# Altium PCB board.PcbDoc
Units mm, origin at the board's own origin, x right, y up, seen from the top; angles counter-clockwise.
Board outline 116 x 94 mm, 2 copper layers (Top Layer, Bottom Layer); 37 components, 58 nets, 544 pads, 102 vias.
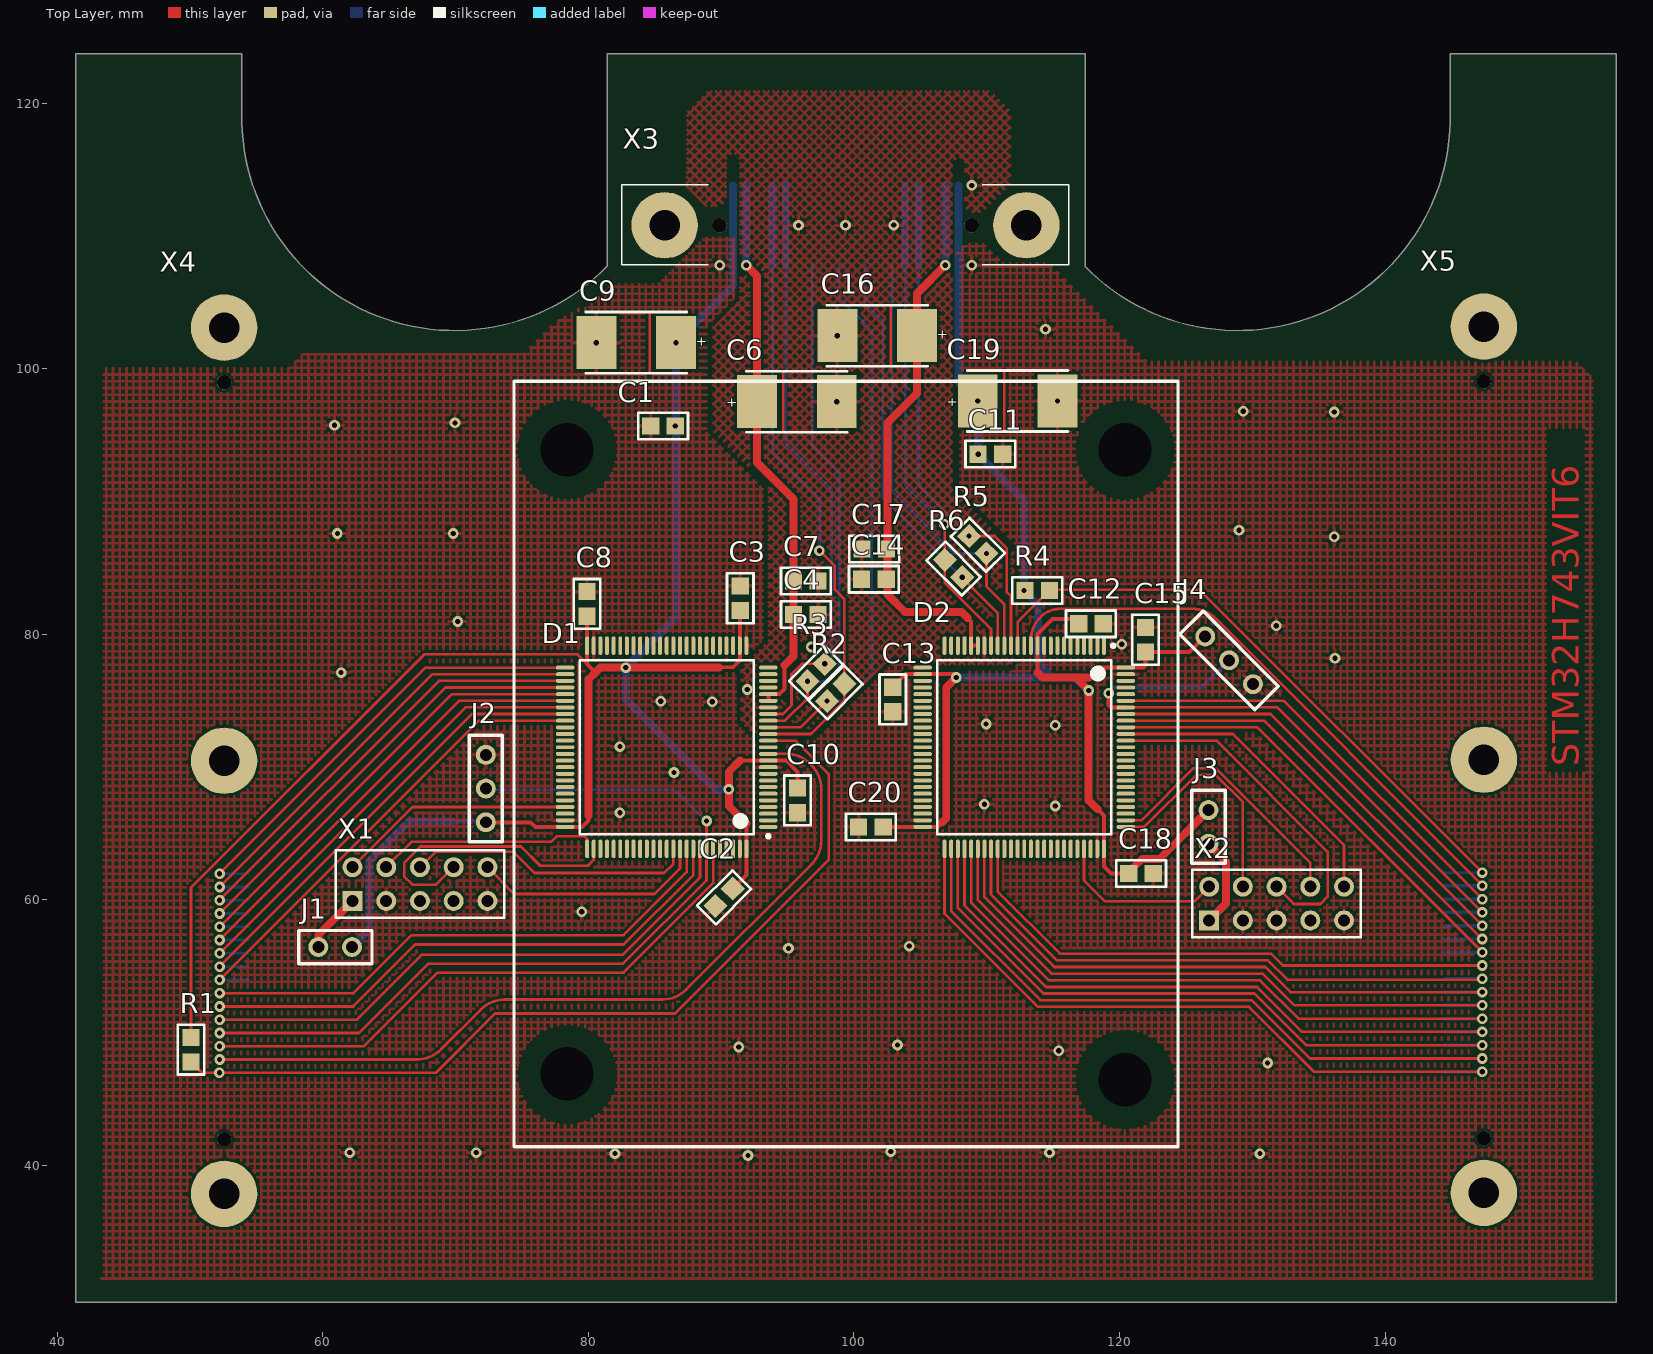
[diagram p0: Top Layer view]
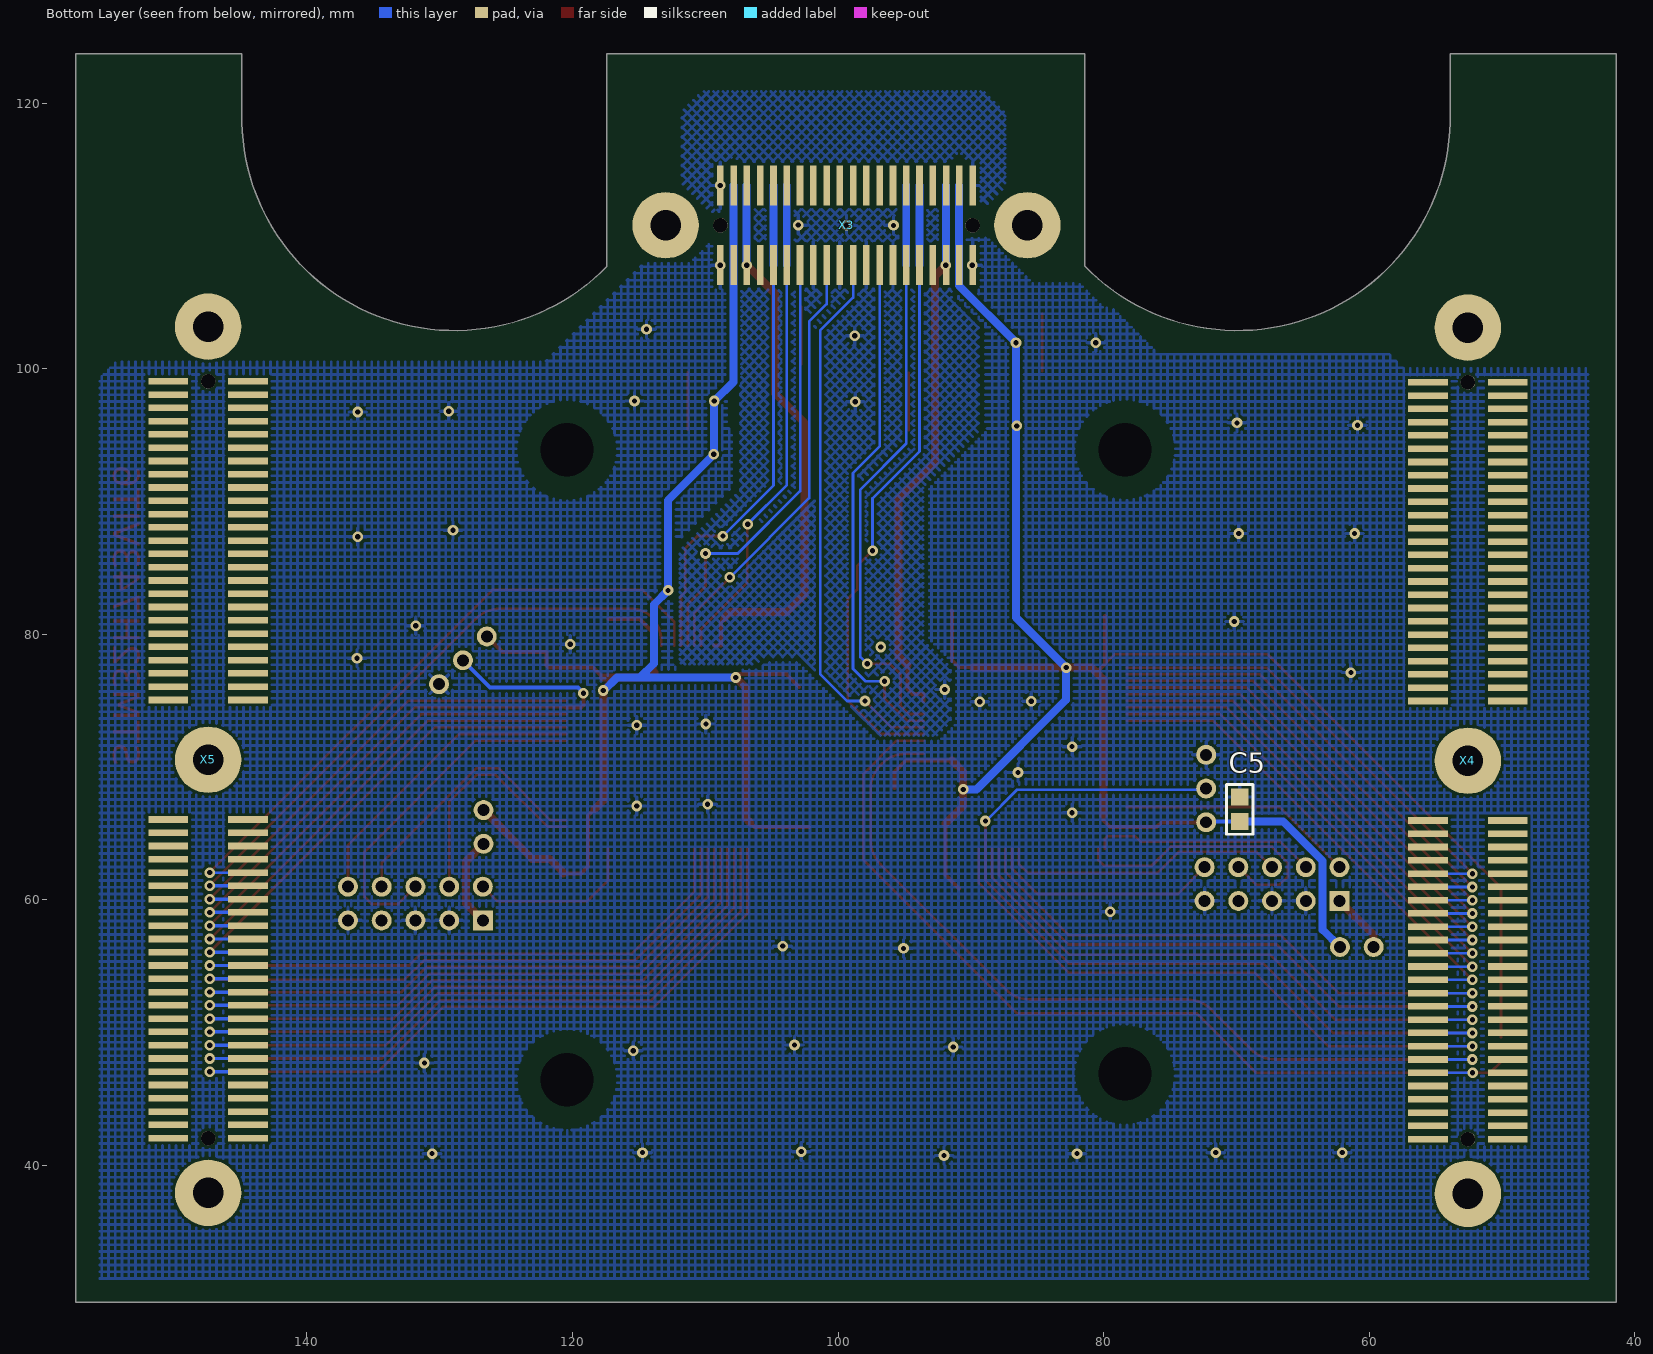
[diagram p1: Bottom Layer view, seen from below]

## Layer stack, top to bottom
Top Solder: solder mask 0.0102, Solder Resist, Dk 3.5
Top Layer: signal copper 0.0356
Dielectric 1: dielectric 0.32, FR-4, Dk 4.8
Bottom Layer: signal copper 0.0356
Bottom Solder: solder mask 0.0102, Solder Resist, Dk 3.5

## Board outline
41.4,29.718 41.4,123.718 53.899,123.718 53.902,123.721 53.902,118.571 ccw(c69.927,118.908) 81.402,107.718 81.402,123.718 117.402,123.718 117.402,107.718 ccw(c128.877,118.908) 144.902,118.571 144.902,123.721 144.905,123.718 157.402,123.718 157.402,29.718

## Design rules (kind name [scope] priority, off if disabled: settings)
BoardOutlineClearance [All] p1: gap=1 ignorepadtopadclearanceinfootprint=FALSE
Clearance [All] p1: gap=0.15 ignorepadtopadclearanceinfootprint=FALSE except(0: Arc-Hole Track-Hole SMDPad-Hole THPad-Hole Via-Hole Fill-Hole Poly-Hole Region-Hole Text-Hole; 0.2: Arc-Poly Track-Poly SMDPad-Poly THPad-Poly Via-Poly Fill-Poly Poly-Poly)
ComponentClearance [All] p1: gap=0.15 collisioncheckmode=3 verticalgap=0.254 showdistances=FALSE
HoleSize [All] p1: absolutevalues=TRUE maxlimit=7 minlimit=0.025 maxpercent=80.000 minpercent=20.000
MinimumAnnularRing [All] p1: minimumring=0.2
MinimumSolderMaskSliver [All] p1: minsoldermaskwidth=0.15
PolygonConnect [All] p1: connectstyle=Relief reliefconductorwidth=0.254 reliefentries=4 polygonreliefangle="90 Angle" airgapwidth=0.254
RoutingVias [All] p1: holewidth=0.4 width=0.7 viastyle="Through Hole" minholewidth=0.4 minwidth=0.7 maxholewidth=7 maxwidth=7
SilkToSolderMaskClearance [IsPad] p1: minsilkscreentomaskgap=0.15 clearancetoexposedcopper=TRUE
SolderMaskExpansion [All] p1: expansion=0.05
Width [All] p1: maxlimit=2 minlimit=0.15 preferedwidth=0.254
26 further rules are at their usual default settings.

## Classes and differential pairs
channel class device1: D1 D2
component class D2: C11 C12 C13 C14 C15 C16 C17 C18 C19 C20 D2 J1_D2 J3 J4 R1 R4 R6 R13 X2
component class main: X3 X4 X5
component class D1: C1 C2 C3 C4 C5 C6 C7 C8 C9 C10 D1 J1 J2 R1 R2 R3 R7 X1

## Components (designator, comment, footprint, x,y, rotation, side; value= is the part's Value field where it differs from the comment)
C1 "4.7u" 0805 85.625,95.7 r0 top
C2 "100n" 0805 90.225,60.2 r45 top
C3 "100n" 0805 91.44,82.725 r270 top
C4 "4.7u" 0805 96.375,81.5 r180 top
C5 "100n" 0805 69.75,66.825 r270 bottom
C6 "C_Ta" C_Ta 95.7,97.525 r0 top (schematic designator C8)
C7 "100n" 0805 96.375,84.025 r180 top (schematic designator C6)
C8 "100n" 0805 79.9,82.296 r270 top (schematic designator C7)
C9 "C_Ta" C_Ta 83.6,101.975 r180 top (schematic designator C10)
C10 "100n" 0805 95.75,67.5 r90 top (schematic designator C9)
C11 "4.7u" 0805 110.275,93.575 r180 top (schematic designator C1)
C12 "100n" 0805 117.85,80.8 r180 top (schematic designator C2)
C13 "100n" 0805 102.925,75.1 r90 top (schematic designator C3)
C14 "4.7u" 0805 101.5,84.15 r0 top (schematic designator C4)
C15 "100n" 0805 121.95,79.6 r270 top (schematic designator C5)
C16 "C_Ta" C_Ta 101.75,102.5 r180 top (schematic designator C8)
C17 "100n" 0805 101.525,86.438 r0 top (schematic designator C6)
C18 "100n" 0805 121.625,62 r180 top (schematic designator C7)
C19 "C_Ta" C_Ta 112.325,97.575 r0 top (schematic designator C10)
C20 "100n" 0805 101.275,65.5 r0 top (schematic designator C9)
D1 "STM32H743VIT6" STM32H743VIT6 85.9,71.5 r180 top
D2 "STM32H743VIT6" STM32H743VIT6 112.825,71.5 r270 top locked (schematic designator D1)
J1 "jumper switch" JUMPER_SWITCH 62.2,56.45 r180 top
J2 "JUMPER_SWITCH_2S" JUMPER_SWITCH_2S 72.275,68.39 r90 top
J3 "jumper switch" JUMPER_SWITCH 126.7,66.765 r270 top (schematic designator J1)
J4 "JUMPER_SWITCH_2S" JUMPER_SWITCH_2S 128.25,78.05 r315 top (schematic designator J2)
R1 "10k" 0805 50.075,48.725 r270 top
R2 "470" 0805 98.625,75.636 r225 top
R3 "470" 0805 97.15,77.125 r225 top
R4 "10k" 0805 113.8,83.312 r0 top (schematic designator R1)
R5 "470" 0805 109.325,86.75 r315 top (schematic designator R2)
R6 "470" 0805 107.5,84.95 r315 top (schematic designator R3)
X1 "JTAG" JTAG_PLD 67.4,61.175 r0 top
X2 "JTAG" JTAG_PLD 131.916,59.708 r0 top (schematic designator X1)
X3 "FSI120" FSI-120 100.03,110.997 r0 top (schematic designator X2)
X4 "FSI-150-L" FSI-150 52.626,70.507 r0 top locked (schematic designator X3)
X5 "FSI-150-R" FSI-150 147.501,70.582 r0 top (schematic designator X4)

## Footprints (in the part's own frame and the unit in brackets; to place one, negate y for a bottom-side part, rotate by r counter-clockwise, add the part's x,y. Pads: shape width x height; smd on the part's side, far side on the other; paste and mask are expansions set on the pad)
0805 [mm]
  rect 1.3x1.3 smd: 1(-0.925,0) 2(0.925,0)
  silkscreen extent -1.88,-1 1.88,1, body extent -1,-0.63 1,0.63, height 0.4
C_Ta [mm]
  rect 3x4 smd: 1(-3,0) 2(3,0)
  Top Layer lines w0.2: -1.016,-2.159 -1.016,2.159
  silkscreen extent -3.8,-2.3 3.8,2.3, body extent -3.8,-2.3 3.8,2.3, height 4.3
FSI-120 [mm]
  rect 0.5x3 smd far side: 1(8.833,-3.186) 2(7.833,-3.186) 3(6.833,-3.186) 4(5.833,-3.186) 5(4.833,-3.186) 6(3.833,-3.186) 7(2.833,-3.186) 8(1.833,-3.186) 9(0.833,-3.186) 10(-0.167,-3.186) 11(-1.167,-3.186) 12(-2.167,-3.186) 13(-3.167,-3.186) 14(-4.167,-3.186) 15(-5.167,-3.186) 16(-6.167,-3.186) 17(-7.167,-3.186) 18(-8.167,-3.186) 19(-9.167,-3.186) 20(-10.167,-3.186) 21(-10.167,2.814) 22(-9.167,2.814) 23(-8.167,2.814) 24(-7.167,2.814) 25(-6.167,2.814) 26(-5.167,2.814) 27(-4.167,2.814) 28(-3.167,2.814) 29(-2.167,2.814) 30(-1.167,2.814) 31(-0.167,2.814) 32(0.833,2.814) 33(1.833,2.814) 34(2.833,2.814) 35(3.833,2.814) 36(4.833,2.814) 37(5.833,2.814) 38(6.833,2.814) 39(7.833,2.814) 40(8.833,2.814)
  round 1.1 hole 1.1 unplated: H1(-10.167,-0.186) H2(8.833,-0.186)
  round 5 hole 2.3: UL_HOLE(12.953,-0.186) UR_HOLE(-14.287,-0.186)
  body extent -17.72,-5.19 16.38,4.81, height 8.25
FSI-150 [mm]
  round 1.1 hole 1.1 unplated: 1(-0.063,-28.521) 1(-0.063,28.479)
  rect 3x0.5 smd far side: R_1(-3.063,-28.52) R_2(2.937,-28.52) R_3(-3.063,-27.52) R_4(2.937,-27.52) R_5(-3.063,-26.52) R_6(2.937,-26.52) R_7(-3.063,-25.52) R_8(2.937,-25.52) R_9(-3.063,-24.52) R_10(2.937,-24.52) R_11(-3.063,-23.52) R_12(2.937,-23.52) R_13(-3.063,-22.52) R_14(2.937,-22.52) R_15(-3.063,-21.52) R_16(2.937,-21.52) R_17(-3.063,-20.52) R_18(2.937,-20.52) R_19(-3.063,-19.52) R_20(2.937,-19.52) R_21(-3.063,-18.52) R_22(2.937,-18.52) R_23(-3.063,-17.52) R_24(2.937,-17.52) R_25(-3.063,-16.52) R_26(2.937,-16.52) R_27(-3.063,-15.52) R_28(2.937,-15.52) R_29(-3.063,-14.52) R_30(2.937,-14.52) R_31(-3.063,-13.52) R_32(2.937,-13.52) R_33(-3.063,-12.52) R_34(2.937,-12.52) R_35(-3.063,-11.52) R_36(2.937,-11.52) R_37(-3.063,-10.52) R_38(2.937,-10.52) R_39(-3.063,-9.52) R_40(2.937,-9.52) R_41(-3.063,-8.52) R_42(2.937,-8.52) R_43(-3.063,-7.52) R_44(2.937,-7.52) R_45(-3.063,-6.52) R_46(2.937,-6.52) R_47(-3.063,-5.52) R_48(2.937,-5.52) R_49(-3.063,-4.52) R_50(2.937,-4.52) R_51(-3.063,4.479) R_52(2.937,4.479) R_53(-3.063,5.479) R_54(2.937,5.479) R_55(-3.063,6.479) R_56(2.937,6.479) R_57(-3.063,7.479) R_58(2.937,7.479) R_59(-3.063,8.479) R_60(2.937,8.479) R_61(-3.063,9.479) R_62(2.937,9.479) R_63(-3.063,10.479) R_64(2.937,10.479) R_65(-3.063,11.479) R_66(2.937,11.479) R_67(-3.063,12.479) R_68(2.937,12.479) R_69(-3.063,13.479) R_70(2.937,13.479) R_71(-3.063,14.479) R_72(2.937,14.479) R_73(-3.063,15.479) R_74(2.937,15.479) R_75(-3.063,16.479) R_76(2.937,16.479) R_77(-3.063,17.479) R_78(2.937,17.479) R_79(-3.063,18.479) R_80(2.937,18.479) R_81(-3.063,19.479) R_82(2.937,19.479) R_83(-3.063,20.479) R_84(2.937,20.479) R_85(-3.063,21.479) R_86(2.937,21.479) R_87(-3.063,22.479) R_88(2.937,22.479) R_89(-3.063,23.479) R_90(2.937,23.479) R_91(-3.063,24.479) R_92(2.937,24.479) R_93(-3.063,25.479) R_94(2.937,25.479) R_95(-3.063,26.479) R_96(2.937,26.479) R_97(-3.063,27.479) R_98(2.937,27.479) R_99(-3.063,28.479) R_100(2.937,28.479)
  round 5 hole 2.3: RB_HOLE(-0.063,-32.641) RM_HOLE(-0.063,-0.021) RU_HOLE(-0.063,32.599)
  body extent -5.14,-36.05 4.86,36.05, height 8.25
JTAG_PLD [mm]
  rect 1.5x1.5 hole 0.9: 1(-5.166,-1.248)
  round 1.5 hole 0.9: 2(-5.166,1.292) 3(-2.626,-1.248) 4(-2.626,1.292) 5(-0.086,-1.248) 6(-0.086,1.292) 7(2.454,-1.248) 8(2.454,1.292) 9(4.994,-1.248) 10(4.994,1.292)
  silkscreen extent -6.44,-2.52 6.26,2.56
JUMPER_SWITCH [mm]
  round 1.5 hole 0.9: 0(0,0) 1(2.54,0)
  silkscreen extent -1.5,-1.25 4,1.25
JUMPER_SWITCH_2S [mm] "2 state jumper switch"
  round 1.5 hole 0.9: 0(0,0) 1(-2.54,0) 2(2.54,0)
  silkscreen extent -4,-1.25 4,1.25
STM32H743VIT6 [mm] "cortex m7 uc"
  oval 1.4x0.3 smd: 1(-7.65,6) 2(-7.65,5.5) 3(-7.65,5) 4(-7.65,4.5) 5(-7.65,4) 6(-7.65,3.5) 7(-7.65,3) 8(-7.65,2.5) 9(-7.65,2) 10(-7.65,1.5) 11(-7.65,1) 12(-7.65,0.5) 13(-7.65,0) 14(-7.65,-0.5) 15(-7.65,-1) 16(-7.65,-1.5) 17(-7.65,-2) 18(-7.65,-2.5) 19(-7.65,-3) 20(-7.65,-3.5) 21(-7.65,-4) 22(-7.65,-4.5) 23(-7.65,-5) 24(-7.65,-5.5) 25(-7.65,-6) 51(7.65,-6) 52(7.65,-5.5) 53(7.65,-5) 54(7.65,-4.5) 55(7.65,-4) 56(7.65,-3.5) 57(7.65,-3) 58(7.65,-2.5) 59(7.65,-2) 60(7.65,-1.5) 61(7.65,-1) 62(7.65,-0.5) 63(7.65,0) 64(7.65,0.5) 65(7.65,1) 66(7.65,1.5) 67(7.65,2) 68(7.65,2.5) 69(7.65,3) 70(7.65,3.5) 71(7.65,4) 72(7.65,4.5) 73(7.65,5) 74(7.65,5.5) 75(7.65,6)
  oval 0.3x1.4 smd: 26(-6,-7.65) 27(-5.5,-7.65) 28(-5,-7.65) 29(-4.5,-7.65) 30(-4,-7.65) 31(-3.5,-7.65) 32(-3,-7.65) 33(-2.5,-7.65) 34(-2,-7.65) 35(-1.5,-7.65) 36(-1,-7.65) 37(-0.5,-7.65) 38(0,-7.65) 39(0.5,-7.65) 40(1,-7.65) 41(1.5,-7.65) 42(2,-7.65) 43(2.5,-7.65) 44(3,-7.65) 45(3.5,-7.65) 46(4,-7.65) 47(4.5,-7.65) 48(5,-7.65) 49(5.5,-7.65) 50(6,-7.65) 76(6,7.65) 77(5.5,7.65) 78(5,7.65) 79(4.5,7.65) 80(4,7.65) 81(3.5,7.65) 82(3,7.65) 83(2.5,7.65) 84(2,7.65) 85(1.5,7.65) 86(1,7.65) 87(0.5,7.65) 88(0,7.65) 89(-0.5,7.65) 90(-1,7.65) 91(-1.5,7.65) 92(-2,7.65) 93(-2.5,7.65) 94(-3,7.65) 95(-3.5,7.65) 96(-4,7.65) 97(-4.5,7.65) 98(-5,7.65) 99(-5.5,7.65) 100(-6,7.65)
  silkscreen extent -7.78,-6.55 6.55,6.82, body extent -6.95,-6.95 6.95,6.95, height 1.6

## Part data
C1 C2 C3 C4 C5 C7 C8 C10 C11 C12 C13 C14 C15 C17 C18 C20: library part C0805, "0805 ceramic capacitor"
  C1 C4 C11 C14: Capacity=4.7u
  C2 C3 C5 C7 C8 C10 C12 C13 C15 C17 C18 C20: Capacity=100n
C6 C9 C16 C19: "tantalum capacitor"
D1 D2: "32-bit cortex m7 uc"
J1 J3: library part JUMPER_SWITCH
J2 J4: "2 state jumper switch"
R1 R2 R3 R4 R5 R6: library part R0805, "0805 resistor"
  R1 R4: Resistance=10k
  R2 R3 R5 R6: Resistance=470
X1 X2: "jtag pld"
X4: "fsi 150 left"
X5: "fsi 150 right"

## Free pads (board coordinates)
  round 7 on Keep-Out: 10(78.425,46.85) 11(78.4,93.907) 12(120.425,93.875) 13(120.425,46.457)
  round 0 hole 4 unplated: Hole(78.4,46.907) Hole(78.4,93.907) Hole(120.4,46.457) Hole(120.4,93.907)

## Via types
v1: diameter 0.8, hole 0.4, Top Layer to Bottom Layer, 102 vias

## Nets (pads, with @x,y where several pads share a name; then routed paths per layer and width w, separated by ;. In a path a pad name is that pad's centre, name@x,y a point inside that pad or via, vN(x,y) a via of type N, cw(c..) or ccw(c..) an arc to the next point about the centre after c; other vN are vias at no path point)
AGND: C4.1 C6.2 C7.1 C14.1 C16.2 C17.1 D1.19 D2.19 X3.8 X3.10 X3.12 X3.14 X3.21 X3.40
  other v1: 91.975,75.85 98.7,97.525 98.75,102.5 95.825,110.8 99.363,110.811 103,110.825 108.883,113.811
BOOT0_D1: D1.94 J2.0 X4.R_18 | length 65.7
  Top Layer w0.2: v1(52.225,49.98) 62.73,49.98 67.95,55.2 82.621,55.2 88.9,61.479 D1.94 v1(88.9,65.95)
  Bottom Layer w0.15: v1@88.875,65.95 v1(88.9,65.95)
  Bottom Layer w0.2: v1(52.225,49.98) X4.R_18@54.363,49.98 ; J2.0 72.365,68.3 86.525,68.3 v1@88.875,65.95
BOOT0_D2: D2.94 J4.0 X5.R_35 | length 48.5
  Top Layer w0.2: D2.94 131.881,74.5 v1(147.32,59.061)
  Top Layer w0.3: v1(119.175,75.575) 119.175,74.7 119.375,74.5 D2.94
  Bottom Layer w0.254: X5.R_35 v1(147.32,59.061)
  Bottom Layer w0.3: v1(119.175,75.575) 119.6,76 126.2,76 J4.0
CLK_IN_D1: D1.12 X4.R_14 | length 64.9
  Top Layer w0.2: v1(52.225,47.986) 67.084,47.986 ccw(c67.084,50.526) 68.88,48.73 71.906,51.756 cw(c73.702,49.96) 73.702,52.5 85.566,52.5 ccw(c85.566,55.04) 87.362,53.244 96.792,62.674 ccw(c94.996,64.47) 97.536,64.47 97.536,68.362 ccw(c94.996,68.362) 96.792,70.158 96.694,70.256 ccw(c94.898,68.46) 94.898,71 D1.12
  Bottom Layer w0.2: v1@52.314,47.986 X4.R_14
CLK_IN_D2: D2.12 X5.R_39 | length 47.2
  Top Layer w0.2: D2.12 113.325,79.523 cw(c115.865,79.523) 114.069,81.319 cw(c115.532,79.856) 115.532,81.925 125.473,81.925 cw(c125.473,79.385) 127.269,81.181 147.271,61.179 cw(c147.154,61.061) v1(147.32,61.061)
  Bottom Layer w0.254: X5.R_39 v1(147.32,61.061)
GND: C1.1 C2.1 C3.1 C5.1 C8.1 C9.2 C10.1 C11.1 C12.1 C13.1 C15.1 C18.1 C19.2 C20.1 D1.10 D1.26 D1.49 D1.74 D1.99 D2.10 D2.26 D2.49 D2.74 D2.99 J2.2 J4.2 X1.3 X1.5 X1.9 X2.3 X2.5 X2.9 X3.1 X3.20
  other v1: 92.025,40.75 82,40.9 130.575,40.9 62.025,40.975 71.55,40.975 114.725,40.975 102.775,41.05 131.15,47.725 115.425,48.65 91.325,48.925 103.275,49.075 95.075,56.35 104.175,56.525 79.5,59.1 82.375,66.575 115.15,67.075 109.825,67.2 86.45,69.6 82.375,71.55 115.15,73.15 109.95,73.25 89.325,74.925 85.45,74.975 61.375,77.125 136.225,78.2 120.175,79.248 131.8,80.65 70.15,80.975 136.175,87.35 61.1,87.6 69.825,87.6 129,87.85 60.875,95.75 69.95,95.925 136.175,96.75 129.325,96.8 115.325,97.575 80.6,101.975 114.425,102.975 89.883,107.811 108.883,107.811
HIGH_IN_D1: D1.15 R2.1 X3.16 X3.25 | length 47.8
  Top Layer w0.2: D1.15 96.762,72.5 99.279,75.017 R2.1 99.279,82.646 98.562,83.363 98.562,85.138 v1(97.4,86.3)
  Bottom Layer w0.2: X3.16 93.863,93.787 97.4,90.25 v1(97.4,86.3)
  Bottom Layer w0.6: X3.16 X3.25
HIGH_IN_D2: D2.15 R5.1 X3.5 X3.36 | length 38.7
  Top Layer w0.2: v1(108.671,87.404) 110.596,87.404 111.5,86.5 111.5,83.2 111.825,82.875 D2.15
  Bottom Layer w0.2: X3.5 104.863,91.212 v1(108.671,87.404)
  Bottom Layer w0.6: X3.5 X3.36
HIGH_OUT_D1: D1.16 R2.2 X3.11 | length 41.3
  Top Layer w0.2: D1.16 95.989,73 v1(97.971,74.981)
  Bottom Layer w0.2: v1(97.971,74.981) 99.322,74.981 101.35,77.01 101.35,102.875 98.863,105.362 X3.11
HIGH_OUT_D2: D2.16 R5.2 X3.7 | length 33.6
  Top Layer w0.2: v1(109.979,86.096) 109.979,83.608 111.325,82.262 D2.16
  Bottom Layer w0.2: X3.7 102.85,107.798 102.85,90.8 107.554,86.096 v1(109.979,86.096)
I2C_SCL_D1: D1.95 X4.R_16 | length 47
  Top Layer w0.2: v1(52.225,48.975) 63.075,48.975 68.625,54.525 82.653,54.525 89.4,61.272 D1.95
  Bottom Layer w0.2: v1(52.225,48.975) 54.358,48.975 X4.R_16@54.363,48.98
I2C_SCL_D2: D2.95 X5.R_37 | length 35.9
  Top Layer w0.2: D2.95 132.381,75 v1(147.32,60.061)
  Bottom Layer w0.254: X5.R_37 v1(147.32,60.061)
I2C_SDA_D1: D1.93 X4.R_20 | length 44.9
  Top Layer w0.2: v1(52.225,50.98) 62.58,50.98 67.475,55.875 82.589,55.875 88.4,61.686 D1.93
  Bottom Layer w0.2: v1(52.225,50.98) X4.R_20@54.363,50.98
I2C_SDA_D2: D2.93 X5.R_33 | length 36.3
  Top Layer w0.2: D2.93 131.381,74 v1(147.32,58.061)
  Bottom Layer w0.254: X5.R_33 v1(147.32,58.061)
JTAG_RST_D1: D1.90 X1.10 | length 17.6
  Top Layer w0.2: X1.10 74.409,60.452 84.977,60.452 86.9,62.375 D1.90
JTAG_RST_D2: D2.90 X2.10 | length 23
  Top Layer w0.2: D2.90 128.547,72.5 136.91,64.137 X2.10
JTAG_TCK_D1: D1.76 X1.4 | length 16.9
  Top Layer w0.2: X1.4 66.682,64.375 77.2,64.375 77.625,64.8 79.7,64.8 79.9,64.6 D1.76
JTAG_TCK_D2: D2.76 X2.4 | length 17.7
  Top Layer w0.2: D2.76 121.857,65.5 125.782,69.425 127.225,69.425 129.29,67.36 X2.4
JTAG_TDI_D1: D1.77 X1.8 | length 22
  Top Layer w0.2: X1.8 68.537,61.15 66.75,61.15 66.125,61.775 66.125,62.8 67.35,64.025 74.925,64.025 76.375,62.575 79.975,62.575 80.4,63 D1.77
JTAG_TDI_D2: D2.77 X2.8 | length 20.3
  Top Layer w0.2: D2.77 121.65,66 125.575,69.925 127.225,69.925 134.37,62.78 X2.8
JTAG_TDO_D1: D1.89 X1.6 | length 21.6
  Top Layer w0.2: X1.6 68.472,63.625 74.35,63.625 75.95,62.025 85.7,62.025 86.4,62.725 D1.89
JTAG_TDO_D2: D2.89 X2.6 | length 26.7
  Top Layer w0.2: D2.89 127.3,72 135.675,63.625 135.675,60.25 135.125,59.7 133.13,59.7 X2.6
JTAG_TMS_D1: D1.72 X1.2 | length 17.9
  Top Layer w0.2: X1.2 66.767,67 D1.72
JTAG_TMS_D2: D2.72 X2.2 | length 12.9
  Top Layer w0.2: D2.72 117.325,61.475 118.9,59.9 125.65,59.9 X2.2
JTAG_VDD_D1: J1.1 X1.1 | length 4.5
  Top Layer w0.6: J1.1 59.66,57.353 X1.1
JTAG_VDD_D2: J3.1 X2.1 | length 6.8
  Top Layer w0.6: J3.1 128.025,62.9 128.025,59.735 X2.1
LOW_IN_D1: D1.18 R3.1 X3.15 X3.26 | length 44.9
  Top Layer w0.2: D1.18 94.65,74 95.3,74.65 95.3,77 96.079,77.779 v1(97.804,77.779)
  Bottom Layer w0.2: X3.15 94.863,94.362 98.325,90.9 98.325,78.3 v1(97.804,77.779)
  Bottom Layer w0.6: X3.15 X3.26
LOW_IN_D2: D2.18 R6.1 X3.6 X3.35 | length 37.3
  Top Layer w0.2: v1(106.8,88.3) 106.846,88.254 R6.1 106.846,83.879 110.325,80.4 D2.18
  Bottom Layer w0.2: X3.6 103.875,107.799 103.875,91.225 v1(106.8,88.3)
  Bottom Layer w0.6: X3.6 X3.35
LOW_OUT_D1: D1.17 R3.2 X3.13 | length 38.9
  Top Layer w0.2: D1.17 94.821,73.5 96.496,75.175 v1(96.496,76.471)
  Bottom Layer w0.2: v1(96.496,76.471) 97.934,76.471 98.875,77.412 98.875,92.15 96.863,94.162 X3.13
LOW_OUT_D2: D2.17 R6.2 X3.9 | length 32.8
  Top Layer w0.2: v1(108.154,84.296) 110.825,81.625 D2.17
  Bottom Layer w0.2: X3.9 100.863,104.887 102.175,103.575 102.175,90.275 v1(108.154,84.296)
NRST_D1: D1.14 R1.2 X4.R_12 | length 70.4
  Top Layer w0.2: R1.2 50.889,46.986 v1(52.214,46.986) 68.511,46.986 72.975,51.45 86.525,51.45 98.1,63.025 98.1,69.5 95.6,72 D1.14
  Bottom Layer w0.2: v1(52.214,46.986) X4.R_12
NRST_D2: D2.14 R4.2 X5.R_41 | length 49.5
  Top Layer w0.2: D2.14 112.325,80.95 114.725,83.35 126.031,83.35 v1(147.32,62.061)
  Bottom Layer w0.2: X5.R_41 v1(147.32,62.061) v1@147.336,62.061
PD8_D1: D1.55 X4.R_34 | length 35.4
  Top Layer w0.2: v1(52.225,57.98) 69.745,75.5 D1.55
  Bottom Layer w0.2: v1(52.225,57.98) X4.R_34@54.363,57.98
PD8_D2: D2.55 X5.R_19 | length 49
  Top Layer w0.2: D2.55 108.825,59.797 114.672,53.95 130.578,53.95 133.467,51.061 v1(147.32,51.061)
  Bottom Layer w0.254: X5.R_19 v1(147.32,51.061)
PD9_D1: D1.56 X4.R_32 | length 35.6
  Top Layer w0.2: v1(52.225,56.98) 70.245,75 D1.56
  Bottom Layer w0.2: v1(52.225,56.98) X4.R_32@54.363,56.98
PD9_D2: D2.56 X5.R_21 | length 48
  Top Layer w0.2: D2.56 109.325,60.004 114.879,54.45 130.786,54.45 133.174,52.061 v1(147.32,52.061)
  Bottom Layer w0.254: X5.R_21 v1(147.32,52.061)
PD10_D1: D1.57 X4.R_30 | length 35.8
  Top Layer w0.2: v1(52.225,55.98) 70.745,74.5 D1.57
  Bottom Layer w0.2: v1(52.225,55.98) X4.R_30@54.363,55.98
PD10_D2: D2.57 X5.R_23 | length 47
  Top Layer w0.2: D2.57 109.825,60.211 115.086,54.95 130.993,54.95 132.881,53.061 v1(147.32,53.061)
  Bottom Layer w0.254: X5.R_23 v1(147.32,53.061)
PD11_D1: D1.58 X4.R_28 | length 36
  Top Layer w0.2: v1(52.225,54.98) 71.245,74 D1.58
  Bottom Layer w0.2: v1(52.225,54.98) X4.R_28@54.363,54.98
PD11_D2: D2.58 X5.R_25 | length 46
  Top Layer w0.2: D2.58 110.325,60.418 115.293,55.45 131.2,55.45 132.65,54 147.259,54 v1(147.32,54.061)
  Bottom Layer w0.254: X5.R_25 v1(147.32,54.061)
PD12_D1: D1.59 X4.R_26 | length 36.2
  Top Layer w0.2: v1(52.225,53.98) 71.745,73.5 D1.59
  Bottom Layer w0.2: v1(52.225,53.98) X4.R_26@54.363,53.98
PD12_D2: D2.59 X5.R_27 | length 44.9
  Top Layer w0.2: D2.59 110.825,60.625 115.5,55.95 131.407,55.95 132.295,55.061 v1(147.32,55.061)
  Bottom Layer w0.254: X5.R_27 v1(147.32,55.061)
SPI_MISO_D1: D1.53 X4.R_38 | length 35
  Top Layer w0.2: v1(52.225,59.98) 68.745,76.5 D1.53
  Bottom Layer w0.2: v1(52.225,59.98) X4.R_38@54.363,59.98
SPI_MISO_D2: D2.53 X5.R_15 | length 51.1
  Top Layer w0.2: D2.53 107.825,59.382 114.257,52.95 130.164,52.95 134.053,49.061 v1(147.32,49.061)
  Bottom Layer w0.254: X5.R_15 v1(147.32,49.061)
SPI_MOSI_D1: D1.54 X4.R_36 | length 35.2
  Top Layer w0.2: v1(52.225,58.98) 69.245,76 D1.54
  Bottom Layer w0.2: v1(52.225,58.98) X4.R_36@54.363,58.98
SPI_MOSI_D2: D2.54 X5.R_17 | length 50.1
  Top Layer w0.2: D2.54 108.325,59.589 114.464,53.45 130.371,53.45 133.76,50.061 v1(147.32,50.061)
  Bottom Layer w0.254: X5.R_17 v1(147.32,50.061)
SPI_NSS_D1: D1.51 X4.R_42 | length 34.6
  Top Layer w0.2: v1(52.225,61.98) 67.745,77.5 D1.51
  Bottom Layer w0.2: v1(52.225,61.98) X4.R_42@54.363,61.98
SPI_NSS_D2: D2.51 X5.R_11 | length 53.2
  Top Layer w0.2: D2.51 106.825,58.968 113.843,51.95 129.75,51.95 134.639,47.061 v1(147.32,47.061)
  Bottom Layer w0.254: X5.R_11 v1(147.32,47.061)
SPI_SCK_D1: D1.52 X4.R_40 | length 34.8
  Top Layer w0.2: v1(52.225,60.98) 68.245,77 D1.52
  Bottom Layer w0.2: v1(52.225,60.98) X4.R_40@54.363,60.98
SPI_SCK_D2: D2.52 X5.R_13 | length 52.2
  Top Layer w0.2: D2.52 107.325,59.175 114.05,52.45 129.957,52.45 134.346,48.061 v1(147.32,48.061)
  Bottom Layer w0.254: X5.R_13 v1(147.32,48.061)
UART_RX_D1: D1.91 X4.R_24 | length 43.9
  Top Layer w0.2: v1(52.225,52.986) 62.311,52.986 66.675,57.35 82.65,57.35 87.4,62.1 D1.91
  Bottom Layer w0.2: v1@52.314,52.986 X4.R_24
UART_RX_D2: D2.91 X5.R_29 | length 36.7
  Top Layer w0.2: D2.91 130.381,73 v1(147.32,56.061)
  Bottom Layer w0.254: X5.R_29 v1(147.32,56.061)
UART_TX_D1: D1.92 X4.R_22 | length 43.9
  Top Layer w0.2: v1(52.225,51.98) 62.28,51.98 66.95,56.65 82.657,56.65 87.9,61.893 D1.92
  Bottom Layer w0.2: v1(52.225,51.98) X4.R_22@54.363,51.98
UART_TX_D2: D2.92 X5.R_31 | length 36.5
  Top Layer w0.2: D2.92 130.875,73.5 v1(147.314,57.061)
  Bottom Layer w0.254: X5.R_31 v1(147.314,57.061)
VDD_D1: C1.2 C2.2 C3.2 C5.2 C8.2 C9.1 C10.2 D1.11 D1.27 D1.50 D1.75 D1.100 J1.0 J2.1 R1.1 X3.19 X3.22 | length 174.2
  Top Layer w0.2: R1.1 50.075,60.937 67.638,78.5 79.175,78.5 79.9,77.775
  Top Layer w0.3: J2.1 75.65,65.85 76,65.5 D1.75 79.525,65.5 80.025,66 80.025,66.35 ; C8.2 D1.50 79.9,77.775 80.538,77.138 ; 89.85,77.5 89.875,77.525 90.9,77.525 91.4,78.025 D1.27 91.4,81.76 C3.2 ; C2.2 91.9,61.875 91.9,65.75 ; 91.425,70.5 D1.11 94.9,70.5 95.75,69.65 C10.2
  Top Layer w0.6: 80.025,66.35 80.025,76.625 80.538,77.138 80.9,77.5 v1(82.825,77.5) 89.85,77.5 ; 91.425,70.5 90.575,69.65 v1(90.575,68.325) 90.575,67.075 91.9,65.75
  Bottom Layer w0.3: C5.2 72.225,65.9 J2.1
  Bottom Layer w0.6: J1.0 63.5,57.75 63.5,62.925 66.475,65.9 C5.2 ; v1(90.575,68.325) 89.575,68.325 82.825,75.075 v1(82.825,77.5) 86.6,81.275 v1(86.6,101.975) 90.883,106.258 X3.22@90.883,113.811
  other v1: 86.55,95.7
VDD_D2: C11.2 C12.2 C13.2 C15.2 C18.2 C19.1 C20.2 D2.11 D2.27 D2.50 D2.75 D2.100 J3.0 J4.1 R4.1 X3.2 X3.39 | length 118.3
  Top Layer w0.3: C20.2 D2.50 106.3,65.5 106.625,65.825 ; C13.2 103.9,77 D2.27 107.45,77 v1(107.7,76.75) ; 113.825,77.125 D2.11 113.825,80.025 114.95,81.15 C12.2@117.306,81.15 ; 117.7,76.75 118.45,77.5 D2.100 121.8,77.5 121.95,77.65 C15.2 125.283,78.675 J4.1 ; 118.325,66.85 118.825,66.35 D2.75 118.825,62.525 119.35,62 C18.2
  Top Layer w0.6: 106.625,65.825 106.95,66.15 106.95,76 v1(107.7,76.75) ; 113.825,77.125 114.2,76.75 116.7,76.75 ; 117.7,76.75 116.7,76.75 ; 118.325,66.85 117.675,67.5 v1(117.675,75.775) 116.7,76.75 ; C18.2 120.7,62.086 121.714,63.1 123.035,63.1 J3.0
  Bottom Layer w0.6: v1(107.7,76.75) 114.925,76.75 ; X3.39 107.863,108.775 107.883,108.755 107.883,99.017 v1(109.325,97.575) 109.325,93.575 112.8,90.1 v1(112.8,83.312) 113.85,82.262 113.85,77.825 114.925,76.75 ; v1@117.65,75.75 116.65,76.75 114.925,76.75
  other v1: 109.35,93.575
VDDA_D1: C4.2 C6.1 C7.2 D1.20 D1.21 X3.18 X3.23 | length 41.6
  Top Layer w0.3: D1.20 D1.21 94.375,75.5 94.775,75.9 94.775,77.675
  Top Layer w0.6: v1(91.883,107.811) 92.7,106.994 C6.1 92.7,92.95 95.45,90.2 C7.2 C4.2 95.45,78.35 94.775,77.675
  Bottom Layer w0.6: v1(91.883,107.811) X3.23@91.883,113.811
VDDA_D2: C14.2 C16.1 C17.2 D2.20 D2.21 X3.3 X3.38 | length 42.1
  Top Layer w0.3: 108.55,81.25 108.825,80.975 D2.21 D2.20
  Top Layer w0.6: v1(106.883,107.811) 104.75,105.678 C16.1 104.75,98.158 102.525,95.933 102.525,83 103.825,81.7 108.1,81.7 108.55,81.25
  Bottom Layer w0.6: v1(106.883,107.811) X3.38@106.883,113.811
pads on no net: D1.1 D1.2 D1.3 D1.4 D1.5 D1.6 D1.7 D1.8 D1.9 D1.13 D1.22 D1.23 D1.24 D1.25 D1.28 D1.29 D1.30 D1.31 D1.32 D1.33 D1.34 D1.35 D1.36 D1.37 D1.38 D1.39 D1.40 D1.41 D1.42 D1.43 D1.44 D1.45 D1.46 D1.47 D1.48 D1.60 D1.61 D1.62 D1.63 D1.64 D1.65 D1.66 D1.67 D1.68 D1.69 D1.70 D1.71 D1.73 D1.78 D1.79 D1.80 D1.81 D1.82 D1.83 D1.84 D1.85 D1.86 D1.87 D1.88 D1.96 D1.97 D1.98 D2.1 D2.2 D2.3 D2.4 D2.5 D2.6 D2.7 D2.8 D2.9 D2.13 D2.22 D2.23 D2.24 D2.25 D2.28 D2.29 D2.30 D2.31 D2.32 D2.33 D2.34 D2.35 D2.36 D2.37 D2.38 D2.39 D2.40 D2.41 D2.42 D2.43 D2.44 D2.45 D2.46 D2.47 D2.48 D2.60 D2.61 D2.62 D2.63 D2.64 D2.65 D2.66 D2.67 D2.68 D2.69 D2.70 D2.71 D2.73 D2.78 D2.79 D2.80 D2.81 D2.82 D2.83 D2.84 D2.85 D2.86 D2.87 D2.88 D2.96 D2.97 D2.98 X1.7 X2.7 X3.4 X3.17 X3.24 X3.27 X3.28 X3.29 X3.30 X3.31 X3.32 X3.33 X3.34 X3.37 X3.H1 X3.H2 X3.UL_HOLE X3.UR_HOLE X4.1 X4.R_1 X4.R_2 X4.R_3 X4.R_4 X4.R_5 X4.R_6 X4.R_7 X4.R_8 X4.R_9 X4.R_10 X4.R_11 X4.R_13 X4.R_15 X4.R_17 X4.R_19 X4.R_21 X4.R_23 X4.R_25 X4.R_27 X4.R_29 X4.R_31 X4.R_33 X4.R_35 X4.R_37 X4.R_39 X4.R_41 X4.R_43 X4.R_44 X4.R_45 X4.R_46 X4.R_47 X4.R_48 X4.R_49 X4.R_50 X4.R_51 X4.R_52 X4.R_53 X4.R_54 X4.R_55 X4.R_56 X4.R_57 X4.R_58 X4.R_59 X4.R_60 X4.R_61 X4.R_62 X4.R_63 X4.R_64 X4.R_65 X4.R_66 X4.R_67 X4.R_68 X4.R_69 X4.R_70 X4.R_71 X4.R_72 X4.R_73 X4.R_74 X4.R_75 X4.R_76 X4.R_77 X4.R_78 X4.R_79 X4.R_80 X4.R_81 X4.R_82 X4.R_83 X4.R_84 X4.R_85 X4.R_86 X4.R_87 X4.R_88 X4.R_89 X4.R_90 X4.R_91 X4.R_92 X4.R_93 X4.R_94 X4.R_95 X4.R_96 X4.R_97 X4.R_98 X4.R_99 X4.R_100 X4.RB_HOLE X4.RM_HOLE X4.RU_HOLE X5.1 X5.R_1 X5.R_2 X5.R_3 X5.R_4 X5.R_5 X5.R_6 X5.R_7 X5.R_8 X5.R_9 X5.R_10 X5.R_12 X5.R_14 X5.R_16 X5.R_18 X5.R_20 X5.R_22 X5.R_24 X5.R_26 X5.R_28 X5.R_30 X5.R_32 X5.R_34 X5.R_36 X5.R_38 X5.R_40 X5.R_42 X5.R_43 X5.R_44 X5.R_45 X5.R_46 X5.R_47 X5.R_48 X5.R_49 X5.R_50 X5.R_51 X5.R_52 X5.R_53 X5.R_54 X5.R_55 X5.R_56 X5.R_57 X5.R_58 X5.R_59 X5.R_60 X5.R_61 X5.R_62 X5.R_63 X5.R_64 X5.R_65 X5.R_66 X5.R_67 X5.R_68 X5.R_69 X5.R_70 X5.R_71 X5.R_72 X5.R_73 X5.R_74 X5.R_75 X5.R_76 X5.R_77 X5.R_78 X5.R_79 X5.R_80 X5.R_81 X5.R_82 X5.R_83 X5.R_84 X5.R_85 X5.R_86 X5.R_87 X5.R_88 X5.R_89 X5.R_90 X5.R_91 X5.R_92 X5.R_93 X5.R_94 X5.R_95 X5.R_96 X5.R_97 X5.R_98 X5.R_99 X5.R_100 X5.RB_HOLE X5.RM_HOLE X5.RU_HOLE
copper on no net:
  other v1: 96.775,79.05

## Polygon pours and split planes (outlines as drawn)
GND on Top Layer "GND_TOP" (hatched 90Degree grid 0.508 track 0.203, pour order 4): 88.525,109.625 85.275,106.375 81.775,106.375 79.975,104.575 78.6,104.575 75.125,101.1 58.5,101.1 57.45,100.05 43.5,100.05 43.5,31.675 43.325,31.5 43.35,31.475 155.575,31.475 155.6,31.5 155.6,99.275 154.35,100.525 122.05,100.525 114.625,107.95 111.15,107.95 109.7,109.4 108.375,109.4 108.375,109.375 107.7,108.7 108,108.4 108,90.975 112.236,86.739 112.236,82.05 112.236,77.536 111.875,77.175 106.125,77.175 105.4,77.9 103.05,77.9 97.125,71.975 92.375,71.975 91.1,73.25 91.1,77.55 93.125,79.575 93.125,90.95 88.9,95.175 88.9,103.25 90.975,105.325 90.975,109.75 90.875,109.85 88.75,109.85
AGND on Top Layer "AGND" (hatched 45Degree grid 0.508 track 0.21, pour order 0): 94.75,72.375 94.725,72.35 92.625,72.35 91.525,73.45 91.525,76.325 91.525,77.425 92.775,78.675 93.6,79.5 93.6,90.375 93.6,91.125 91.675,93.05 89.425,95.3 89.425,98.375 89.425,103.125 91.125,104.825 91.45,105.15 91.45,108.25 91.45,115.825 91,116.275 90.775,116.275 90.35,115.825 90.35,115.625 90.35,114.6 90.35,112.7 89.925,112.275 88.875,112.275 88.35,112.8 87.825,113.325 87.417,113.733 87.475,115.925 87.475,119.3 88.525,120.35 89.05,120.875 95.7,120.875 110.25,120.875 111.6,119.525 111.75,119.375 111.75,115.15 111.75,113.975 110.525,112.75 109.6,111.825 109.15,111.825 108.775,111.825 108.55,112.05 108.4,112.2 108.4,115.125 108.4,115.65 108.2,115.85 108.125,115.925 107.775,115.925 107.7,115.925 107.35,115.575 107.35,106.05 107.35,90.9 112.025,86.225 112.025,78 112,78 111.825,77.825 111.75,77.75 106.775,77.75 106.25,77.75 105.65,78.35 105.625,78.325 103.925,78.325 102.775,78.325 96.825,72.375
GND on Bottom Layer "GND_BOT" (hatched 90Degree grid 0.508 track 0.203, pour order 6): 88.75,109.85 85.344,106.444 81.857,106.444 79.988,104.575 79.351,104.575 75.876,101.1 58.5,101.1 57.45,100.05 43.5,100.05 43.525,100.025 43.525,31.475 155.575,31.475 155.6,31.5 155.6,99.275 154.35,100.525 122.05,100.525 114.625,107.95 111.15,107.95 109.7,109.4 108.375,109.4 108.375,95.648 108,95.273 108,91.1 112.5,86.6 112.5,77.8 111.916,77.216 111.757,77.375 105.925,77.375 105.4,77.9 103.05,77.9 97.125,71.975 92.375,71.975 91.1,73.25 91.1,77.575 93.125,79.6 93.125,91 88.7,95.425 88.9,95.625 88.9,103.25 91.2,105.55 91.2,109.825
AGND on Bottom Layer "AGND_BOT" (hatched 45Degree grid 0.508 track 0.21, pour order 2): 96.825,72.375 102.746,78.296 105.596,78.296 105.625,78.325 106.2,77.75 111.75,77.75 111.775,77.75 112.025,78 111.92,78.105 111.92,86.28 107.35,90.85 107.35,108.27 107.35,115.575 107.7,115.925 108.125,115.925 108.4,115.65 108.4,112.2 108.775,111.825 109.6,111.825 111.75,113.975 111.75,119.375 110.25,120.875 89.05,120.875 87.475,119.3 87.417,119.242 87.417,113.741 88.883,112.275 89.925,112.275 90.35,112.7 90.356,115.831 90.356,115.856 90.775,116.275 91,116.275 91.45,115.825 91.45,108.302 91.45,105.15 91.278,104.978 89.425,103.125 89.425,95.3 93.6,91.125 93.6,90.726 93.6,79.539 91.525,77.464 91.525,77.425 91.525,73.45 92.6,72.375

## Other copper
Top Layer:
  text "STM32H743VIT6" at 154.6,70.075 h2 r90

## Silkscreen, mask and mechanical layers (free items; w line width, h text height)
Top Overlay:
  lines w0.1: 89.029,107.855 82.529,107.855 82.529,113.855 89.029,113.855 ; 109.669,107.855 116.169,107.855 116.169,113.855 109.669,113.855
  lines w0.254: 74.4,41.407 124.4,41.407 124.4,99.06 74.4,99.06 74.4,41.407
Mechanical 1:
  lines w0.2: 41.4,29.718 157.402,29.718 ; 53.902,118.571 53.902,123.721 ; 81.402,107.718 81.402,123.718 ; 117.402,107.718 117.402,123.718 ; 144.902,118.571 144.902,123.721
  lines w0.254: 41.4,29.718 41.4,123.718 53.899,123.718 ; 53.902,118.571 ccw(c69.927,118.908) 81.402,107.718 ; 81.402,123.718 117.402,123.718 ; 117.402,107.718 ccw(c128.877,118.908) 144.902,118.571 ; 144.905,123.718 157.402,123.718 157.402,29.718
Mechanical 8:
  lines w0.2: 99.402,29.718 99.402,76.718 99.402,123.718
  lines w0.254: 50.561,41.986 52.563,41.986 ; 50.561,98.986 52.563,98.986 ; 52.563,40.038 52.563,41.986 ; 52.563,44.038 52.563,41.986 ; 52.563,97.038 52.563,98.986 ; 52.563,101.038 52.563,98.986 ; 54.561,41.986 52.563,41.986 ; 54.561,98.986 52.563,98.986 ; 83.761,110.811 85.763,110.811 ; 85.763,108.863 85.763,110.811 ; 85.763,112.863 85.763,110.811 ; 87.761,110.811 85.763,110.811 ; 87.861,110.811 89.863,110.811 ; 89.863,108.863 89.863,110.811 ; 89.863,112.863 89.863,110.811 ; 91.861,110.811 89.863,110.811 ; 106.861,110.811 108.863,110.811 ; 108.863,108.863 108.863,110.811 ; 108.863,112.863 108.863,110.811 ; 110.861,110.811 108.863,110.811 ; 110.961,110.811 112.963,110.811 ; 112.963,108.863 112.963,110.811 ; 112.963,112.863 112.963,110.811 ; 114.961,110.811 112.963,110.811 ; 145.436,42.061 147.438,42.061 ; 145.436,99.061 147.438,99.061 ; 147.438,40.113 147.438,42.061 ; 147.438,44.113 147.438,42.061 ; 147.438,97.113 147.438,99.061 ; 147.438,101.113 147.438,99.061 ; 149.436,42.061 147.438,42.061 ; 149.436,99.061 147.438,99.061
  lines w0.45: 41.402,29.718 157.402,123.718 ; 41.402,123.718 157.402,29.718 ; 41.684,76.718 99.402,76.718 157.402,76.718

## Text inside footprints (layer, text, board x,y; h text height)
C6: Top Overlay "+" at 90.366,97.15 h0.75
C9: Top Overlay "+" at 88.934,102.35 h0.75 r180
C16: Top Overlay "+" at 107.084,102.875 h0.75 r180
C19: Top Overlay "+" at 106.991,97.2 h0.75